# Altium PCB IR_7arry.PcbDoc
Units mil, origin at the board's own origin, x right, y up, seen from the top; angles counter-clockwise.
Board outline 5690 x 1290 mil, 2 copper layers (Top Layer, Bottom Layer); 22 components, 16 nets, 90 pads, 0 vias.
Unrouted connection lines stored in the file: 1.
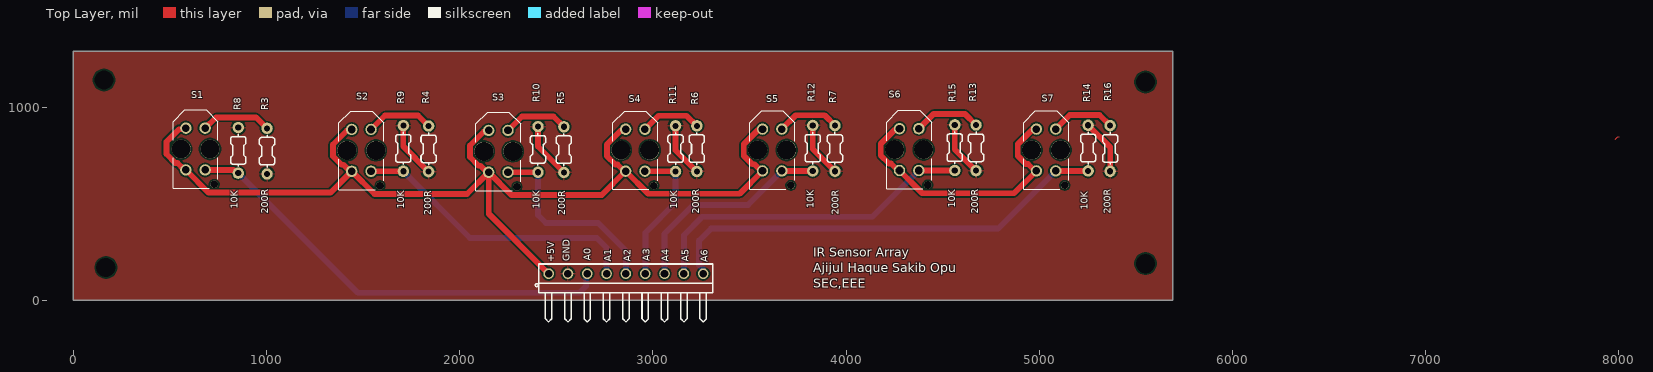
[diagram p0: Top Layer view]
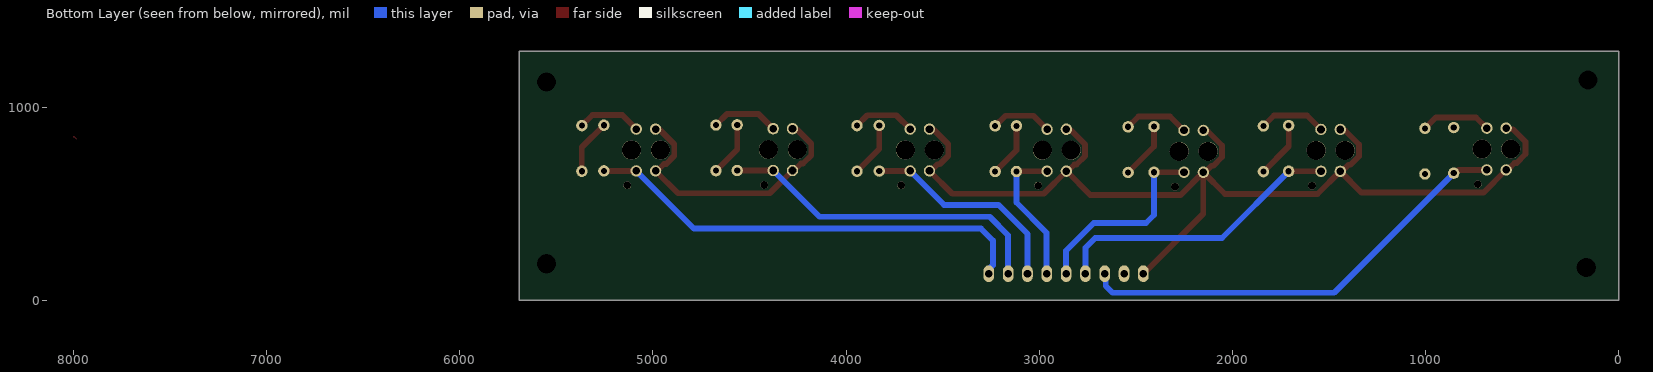
[diagram p1: Bottom Layer view, seen from below]

## Layer stack, top to bottom
Top Solder: solder mask 0.4, Solder Resist, Dk 3.5
Top Layer: signal copper 1.4
Dielectric 1: dielectric 12.6, FR-4, Dk 4.8
Bottom Layer: signal copper 1.4
Bottom Solder: solder mask 0.4, Solder Resist, Dk 3.5

## Board outline
0,0 5690,0 5690,1290 0,1290

## Design rules (kind name [scope] priority, off if disabled: settings)
Clearance [All] p1: gap=8 ignorepadtopadclearanceinfootprint=TRUE
PolygonConnect [All] p1: connectstyle=Relief reliefconductorwidth=10 reliefentries=4 polygonreliefangle="90 Angle" airgapwidth=10
RoutingVias [All] p1: holewidth=28 width=50 viastyle="Through Hole" minholewidth=28 minwidth=50 maxholewidth=28 maxwidth=50
SolderMaskExpansion [All] p1: expansion=4 istentingtop=FALSE
Width [All] p1: maxlimit=30 minlimit=8 preferedwidth=15
30 further rules are at their usual default settings.

## Components (designator, comment, footprint, x,y, rotation, side; value= is the part's Value field where it differs from the comment)
J1 "HDR1X9" HDRR_M_1X9 2861,138 r0 top value=HDRM9
R3 "200R" "RES TH 1/8W AXIAL-0.25" 1004,772 r90 top value=1K
R4 "200R" "RES TH 1/8W AXIAL-0.25" 1840,784 r90 top value=1K
R5 "200R" "RES TH 1/8W AXIAL-0.25" 2540,780 r90 top value=1K
R6 "200R" "RES TH 1/8W AXIAL-0.25" 3228,785 r90 top value=1K
R7 "200R" "RES TH 1/8W AXIAL-0.25" 3943,786 r90 top value=1K
R8 "10K" "RES TH 1/8W AXIAL-0.25" 855,776 r270 top value=1K
R9 "10K" "RES TH 1/8W AXIAL-0.25" 1709,786.11 r270 top value=1K
R10 "10K" "RES TH 1/8W AXIAL-0.25" 2406,781 r270 top value=1K
R11 "10K" "RES TH 1/8W AXIAL-0.25" 3118,785 r270 top value=1K
R12 "10K" "RES TH 1/8W AXIAL-0.25" 3828,787 r270 top value=1K
R13 "200R" "RES TH 1/8W AXIAL-0.25" 4673,789 r90 top value=1K
R14 "200R" "RES TH 1/8W AXIAL-0.25" 5367,786 r90 top value=1K
R15 "10K" "RES TH 1/8W AXIAL-0.25" 4563,790 r270 top value=1K
R16 "10K" "RES TH 1/8W AXIAL-0.25" 5253,788 r270 top value=1K
S1 "TCRT5000" OPTO_TCRT5000 633.86,783 r90 top (schematic designator U1)
S2 "TCRT5000" OPTO_TCRT5000 1492.13,776 r90 top (schematic designator U2)
S3 "TCRT5000" OPTO_TCRT5000 2200.79,771 r90 top (schematic designator U3)
S4 "TCRT5000" OPTO_TCRT5000 2909.45,777 r90 top (schematic designator U4)
S5 "TCRT5000" OPTO_TCRT5000 3618.11,778 r90 top (schematic designator U5)
S6 "TCRT5000" OPTO_TCRT5000 4326.77,780 r90 top (schematic designator U6)
S7 "TCRT5000" OPTO_TCRT5000 5035.43,778 r90 top (schematic designator U7)

## Footprints (in the part's own frame and the unit in brackets; to place one, negate y for a bottom-side part, rotate by r counter-clockwise, add the part's x,y. Pads: shape width x height; smd on the part's side, far side on the other; paste and mask are expansions set on the pad)
HDRR_M_1X9 [mm] "Connector; Header; 9 Position"
  round 1.4 / inner round 1.4 / far side oval 1.4x2.2 hole 1 mask+0.1: 1(-10.16,0) 2(-7.62,0) 3(-5.08,0) 4(-2.54,0) 5(0,0) 6(2.54,0) 7(5.08,0) 8(7.62,0) 9(10.16,0)
  silkscreen extent -11.9,-6.35 11.43,1.27, body extent -11.43,-7.35 11.43,1.27, height 5.45
OPTO_TCRT5000 [mm]
  round 1.5 hole 1: A(2.75,1.27) CATH(2.75,-1.27) COLL(-2.75,1.27) E(-2.75,-1.27)
  round 1 hole 1 unplated: ""(-4.65,-2.45)
  round 2.5 hole 2.5 unplated: ""(0,1.9) ""(0,-1.9)
  silkscreen extent -5.15,-2.95 5.15,2.95
"RES TH 1/8W AXIAL-0.25" [mm] "RESISTOR 1/8 WATT, AXIAL0.25"
  round 1.5 hole 0.8: 1(-3,0) 2(3,0)
  silkscreen extent -2.1,-1 2.1,1, body extent -3.2,-0.9 3.2,0.9, height 1.9

## Part data
J1: library part HDRR_M_1X9, "CONN, HEADER, RightAngle, Male, pitch: 2.54mm, 9POS"
R3 R4 R5 R6 R7 R8 R9 R10 R11 R12 R13 R14 R15 R16: library part "Res TH 1/8W AXIAL-0.25", "TH Resistor"
S1 S2 S3 S4 S5 S6 S7: "950 nm 60 mA Through Hole Reflective Optical Sensor with Transistor Output", Package=None, Availability=Unavailable, MP=TCRT5000, Price=None

## Free pads (board coordinates)
  round 60 hole 100: 4(160,1140) 4(170,170) 4(5550,190) 4(5550,1130)

## Nets (pads, with @x,y where several pads share a name; then routed paths per layer and width w, separated by ;. In a path a pad name is that pad's centre, name@x,y a point inside that pad or via, vN(x,y) a via of type N, cw(c..) or ccw(c..) an arc to the next point about the centre after c; other vN are vias at no path point)
+5: J1.1 S1.A S1.COLL S2.A S2.COLL S3.A S3.COLL S4.A S4.COLL S5.A S5.COLL S6.A S6.COLL S7.A S7.COLL | length 7063.6
  Top Layer w30: S1.COLL@578.3,680.29 570.44,680.29 539.94,710.79 529.14,710.79 483,756.93 483,821 547.71,885.71 578.3,885.71 S1.A ; S1.COLL 701.35,557.24 1331.64,557.24 S2.COLL ; S2.A 1436.57,878.71 1417.91,878.71 1345.11,805.91 1345.11,746.09 1389.41,701.79 1400.21,701.79 1434.26,667.73 S2.COLL ; S3.A 2145.23,873.71 2126.57,873.71 2053.77,800.91 2053.77,741.09 2098.07,696.79 2108.87,696.79 2142.93,662.73 S3.COLL ; J1.1 2150.79,448.21 S3.COLL ; S4.A 2853.89,879.71 2835.23,879.71 2762.43,806.91 2762.43,747.09 2806.73,702.79 2817.53,702.79 2851.59,668.73 S4.COLL ; S5.A 3562.55,880.71 3543.89,880.71 3471.09,807.91 3471.09,748.09 3515.4,703.79 3526.19,703.79 3560.25,669.73 S5.COLL 3449.62,551.24 2976.94,551.24 S4.COLL ; S6.A 4271.21,882.71 4252.55,882.71 4179.76,809.91 4179.76,750.09 4222.06,707.79 4232.85,707.79 4268.91,671.73 S6.COLL 4394.26,554.24 4869.94,554.24 S7.COLL 4977.57,669.73 4941.52,705.79 4930.72,705.79 4888.42,748.09 4888.42,807.91 4961.21,880.71 4979.87,880.71 S7.A ; S2.COLL 1559.61,550.24 2038.3,550.24 S3.COLL ; S3.COLL 2268.28,545.24 2735.96,545.24 S4.COLL
A0: J1.3 R8.2 S1.E | length 2316
  Top Layer w30: S1.E 830.3,674.73 847.14,657.89 R8.2
  Bottom Layer w30: R8.2 1473.89,39 2621,39 2656.19,74.19 2656.19,133.19 J1.3
A1: J1.4 R9.2 S2.E | length 1517
  Top Layer w30: S2.E 1542.26,667.87 1708.87,667.87 R9.2
  Bottom Layer w30: R9.2 2054,323 2710,323 2761,272 J1.4
A2: J1.5 R10.2 S3.E | length 1027.4
  Top Layer w30: S3.E 2250.87,662.81 2405.92,662.81 R10.2
  Bottom Layer w30: R10.2 2406,441 2447,400 2718,400 2861,257 J1.5
A3: J1.6 R11.2 S4.E | length 753.2
  Top Layer w30: S4.E 2960.37,667.81 3117.08,667.81 R11.2
  Bottom Layer w30: J1.6 2962,139 2962,350 3118,506 R11.2
A4: J1.7 R12.2 S5.E | length 1108.3
  Top Layer w30: S5.E 3668.53,669.31 3827.58,669.31 R12.2
  Bottom Layer w30: J1.7 3061,344 3211,494 3492.38,494 S5.E
A5: J1.8 R15.2 S6.E | length 1739.7
  Top Layer w30: S6.E 4376.85,671.81 4562.92,671.81 R15.2
  Bottom Layer w30: J1.8 3161,337 3256,432 4137.04,432 S6.E
A6: J1.9 R16.2 S7.E | length 2342.8
  Top Layer w30: S7.E 5085.51,669.81 5252.92,669.81 R16.2
  Bottom Layer w30: J1.9 3261,160.54 3240,181.54 3240,310 3301,371 4786.7,371 S7.E
GND: J1.2 R3.1 R4.1 R5.1 R6.1 R7.1 R8.1 R9.1 R10.1 R11.1 R12.1 R13.1 R14.1 R15.1 R16.1 | length 1720.2
  Top Layer w30: R9.1 1709,796.89 R4.1 ; R10.1 2406,795.89 R5.1 ; R11.1 3118,776.89 R6.1 ; R12.1 3828,782.89 R7.1 ; R15.1 4563,780.89 R13.1 ; R16.1 5367,792.11 R14.1
NetR3_2: R3.2 S1.CATH | length 366.5
  Top Layer w30: S1.CATH 739.23,946.64 947.47,946.64 R3.2
NetR4_2: R4.2 S2.CATH | length 350.5
  Top Layer w30: S2.CATH 1614.61,956.75 1785.36,956.75 R4.2
NetR5_2: R5.2 S3.CATH | length 341.4
  Top Layer w30: S3.CATH 2323.16,951.64 2486.47,951.64 R5.2
NetR6_2: R6.2 S4.CATH | length 319.5
  Top Layer w30: S4.CATH 3029.82,955.64 3175.13,955.64 3227.66,903.11 R6.2
NetR7_2: R7.2 S5.CATH | length 326.6
  Top Layer w30: S5.CATH 3739.48,957.64 3889.47,957.64 R7.2
NetR13_2: R13.2 S6.CATH | length 352
  Top Layer w30: S6.CATH 4453.5,965 4615.11,965 R13.2
NetR14_2: R14.2 S7.CATH | length 334.1
  Top Layer w30: S7.CATH 5157.8,958.64 5312.47,958.64 R14.2
pads on no net: S1. S2. S3. S4. S5. S6. S7.
copper on no net: | length 26.5
  Top Layer w3.94: 7980.28,832.78 7994.43,846.93 7997.69,846.93 8000,844.63

## Polygon pours and split planes (outlines as drawn)
GND on Top Layer "GND_L01_P000" (solid, remove dead copper, pour order 0): 0,0 5690,0 5690,1290 0,1290

## Silkscreen, mask and mechanical layers (free items; w line width, h text height)
Top Overlay:
  text "10K" at 4577.22,479 h60 r90
  text "10K" at 3846.22,476 h60 r90
  text "10K" at 3139.22,475 h60 r90
  text "10K" at 865.22,474 h60 r90
  text "10K" at 1726.22,474 h60 r90
  text "10K" at 2427.22,473 h60 r90
  text "10K" at 5265.22,468 h60 r90
  text "200R" at 1023.22,448 h60 r90
  text "200R" at 3254.22,448 h60 r90
  text "200R" at 4696.22,448 h60 r90
  text "200R" at 5382.22,448 h60 r90
  text "200R" at 3974.22,442 h60 r90
  text "200R" at 1866.22,441 h60 r90
  text "200R" at 2560.22,439 h60 r90
  text "A0" at 2693.22,205 h60 r90
  text "GND" at 2583.22,201 h60 r90
  text "A3" at 2997.22,201 h60 r90
  text "A4" at 3094.89,200 h60 r90
  text "A5" at 3199.22,200 h60 r90
  text "A1" at 2799,199 h60 r90
  text "A2" at 2898,199 h60 r90
  text "A6" at 3297.22,197 h60 r90
  text "+5V" at 2502.22,196 h60 r90
  text "IR Sensor Array  / Ajijul Haque Sakib Opu / SEC,EEE" at 3830,50 h80